# Altium PCB Chargeur.PcbDoc
Units mil, origin at the board's own origin, x right, y up, seen from the top; angles counter-clockwise.
Board outline 2228.79 x 2270.16 mil, 2 copper layers (Top Layer, Bottom Layer); 41 components, 22 nets, 151 pads, 173 vias.
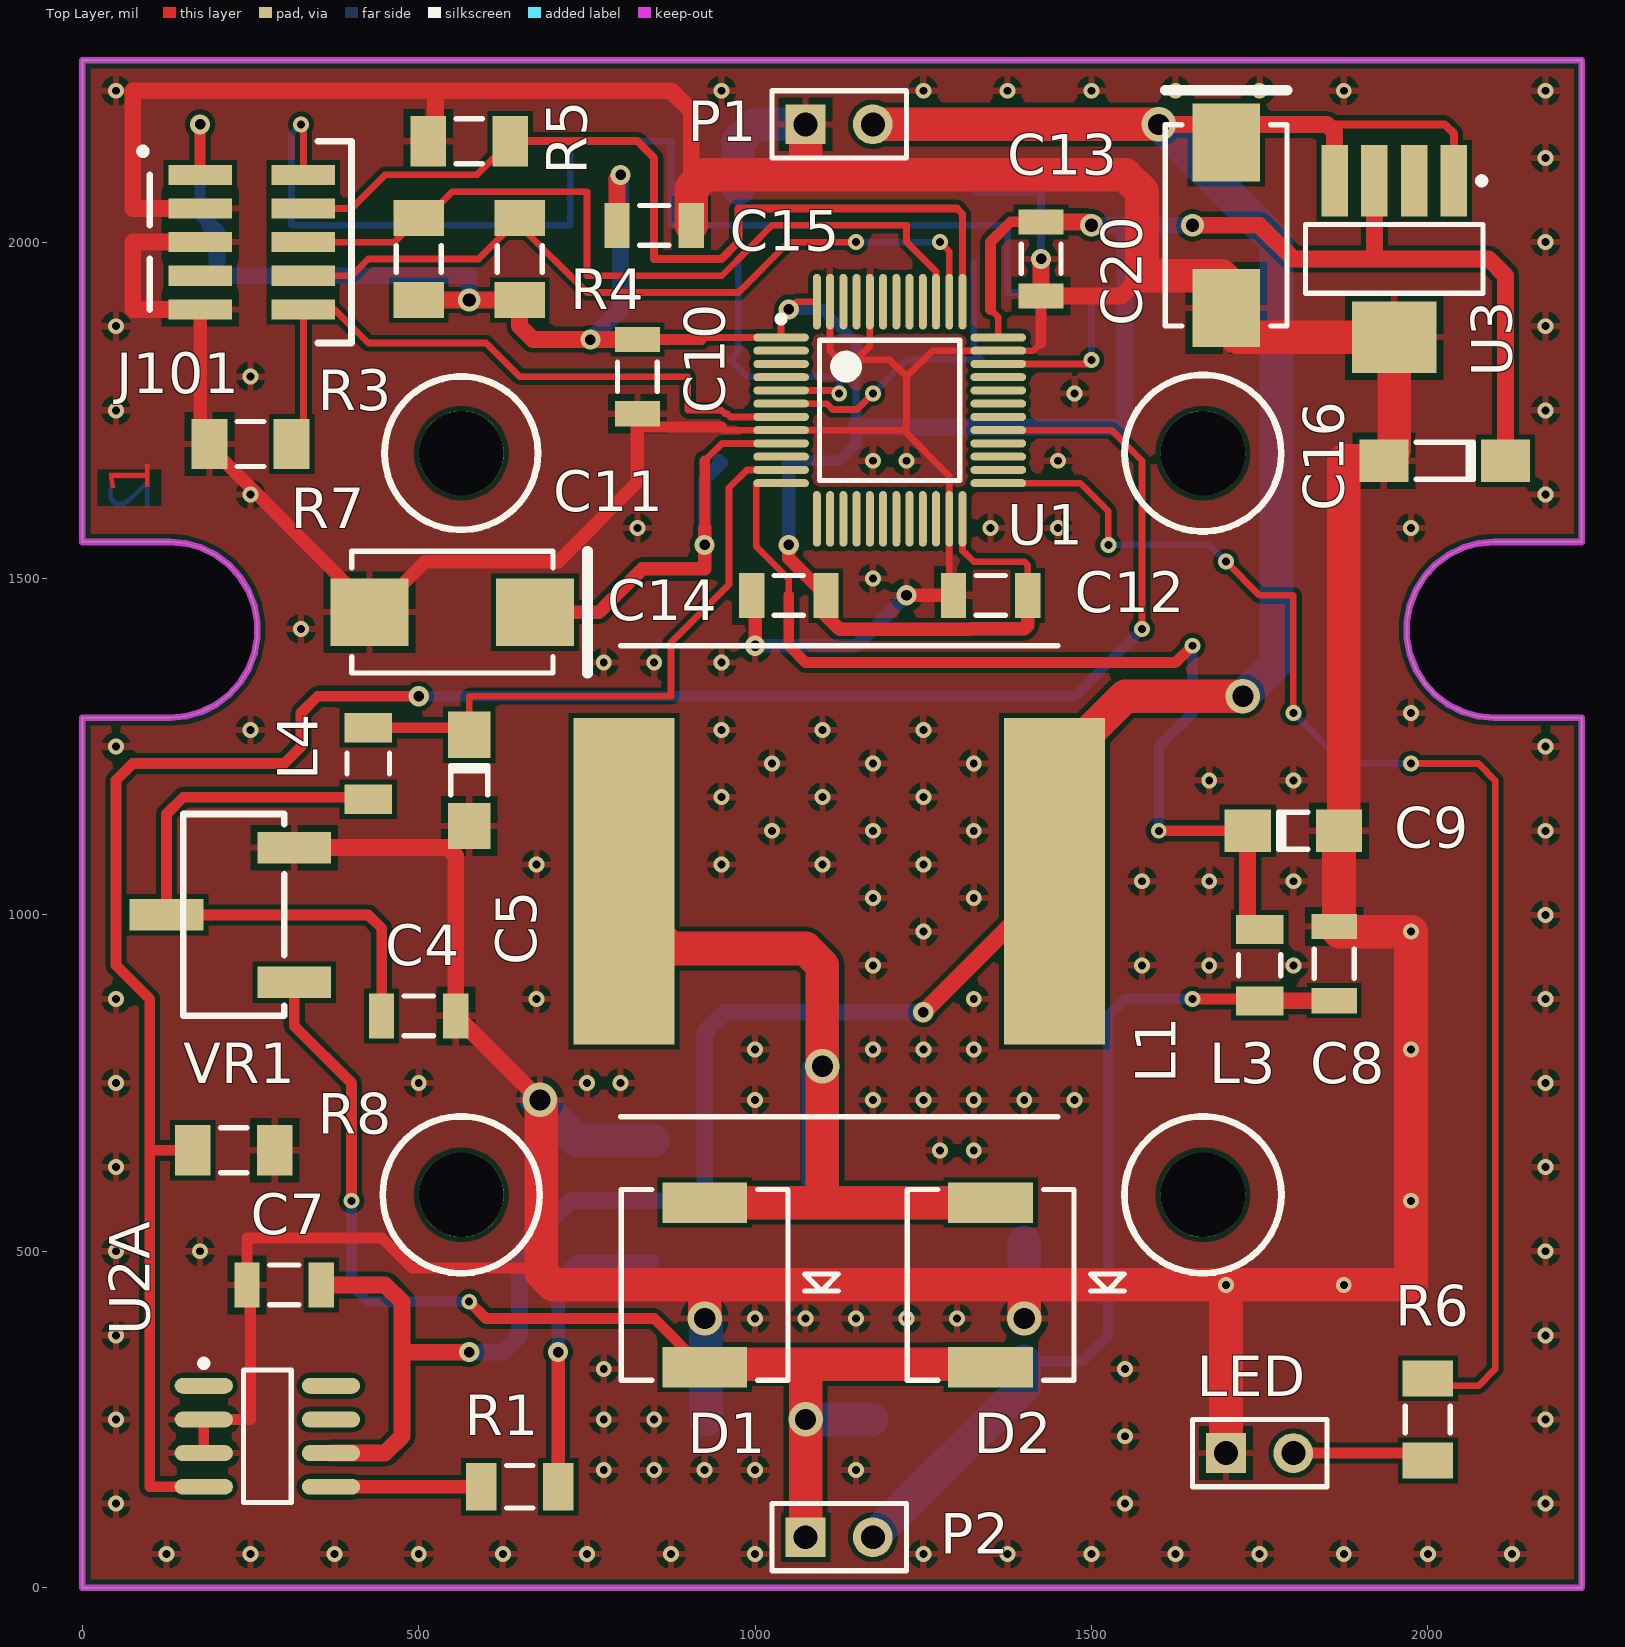
[diagram p0: Top Layer view]
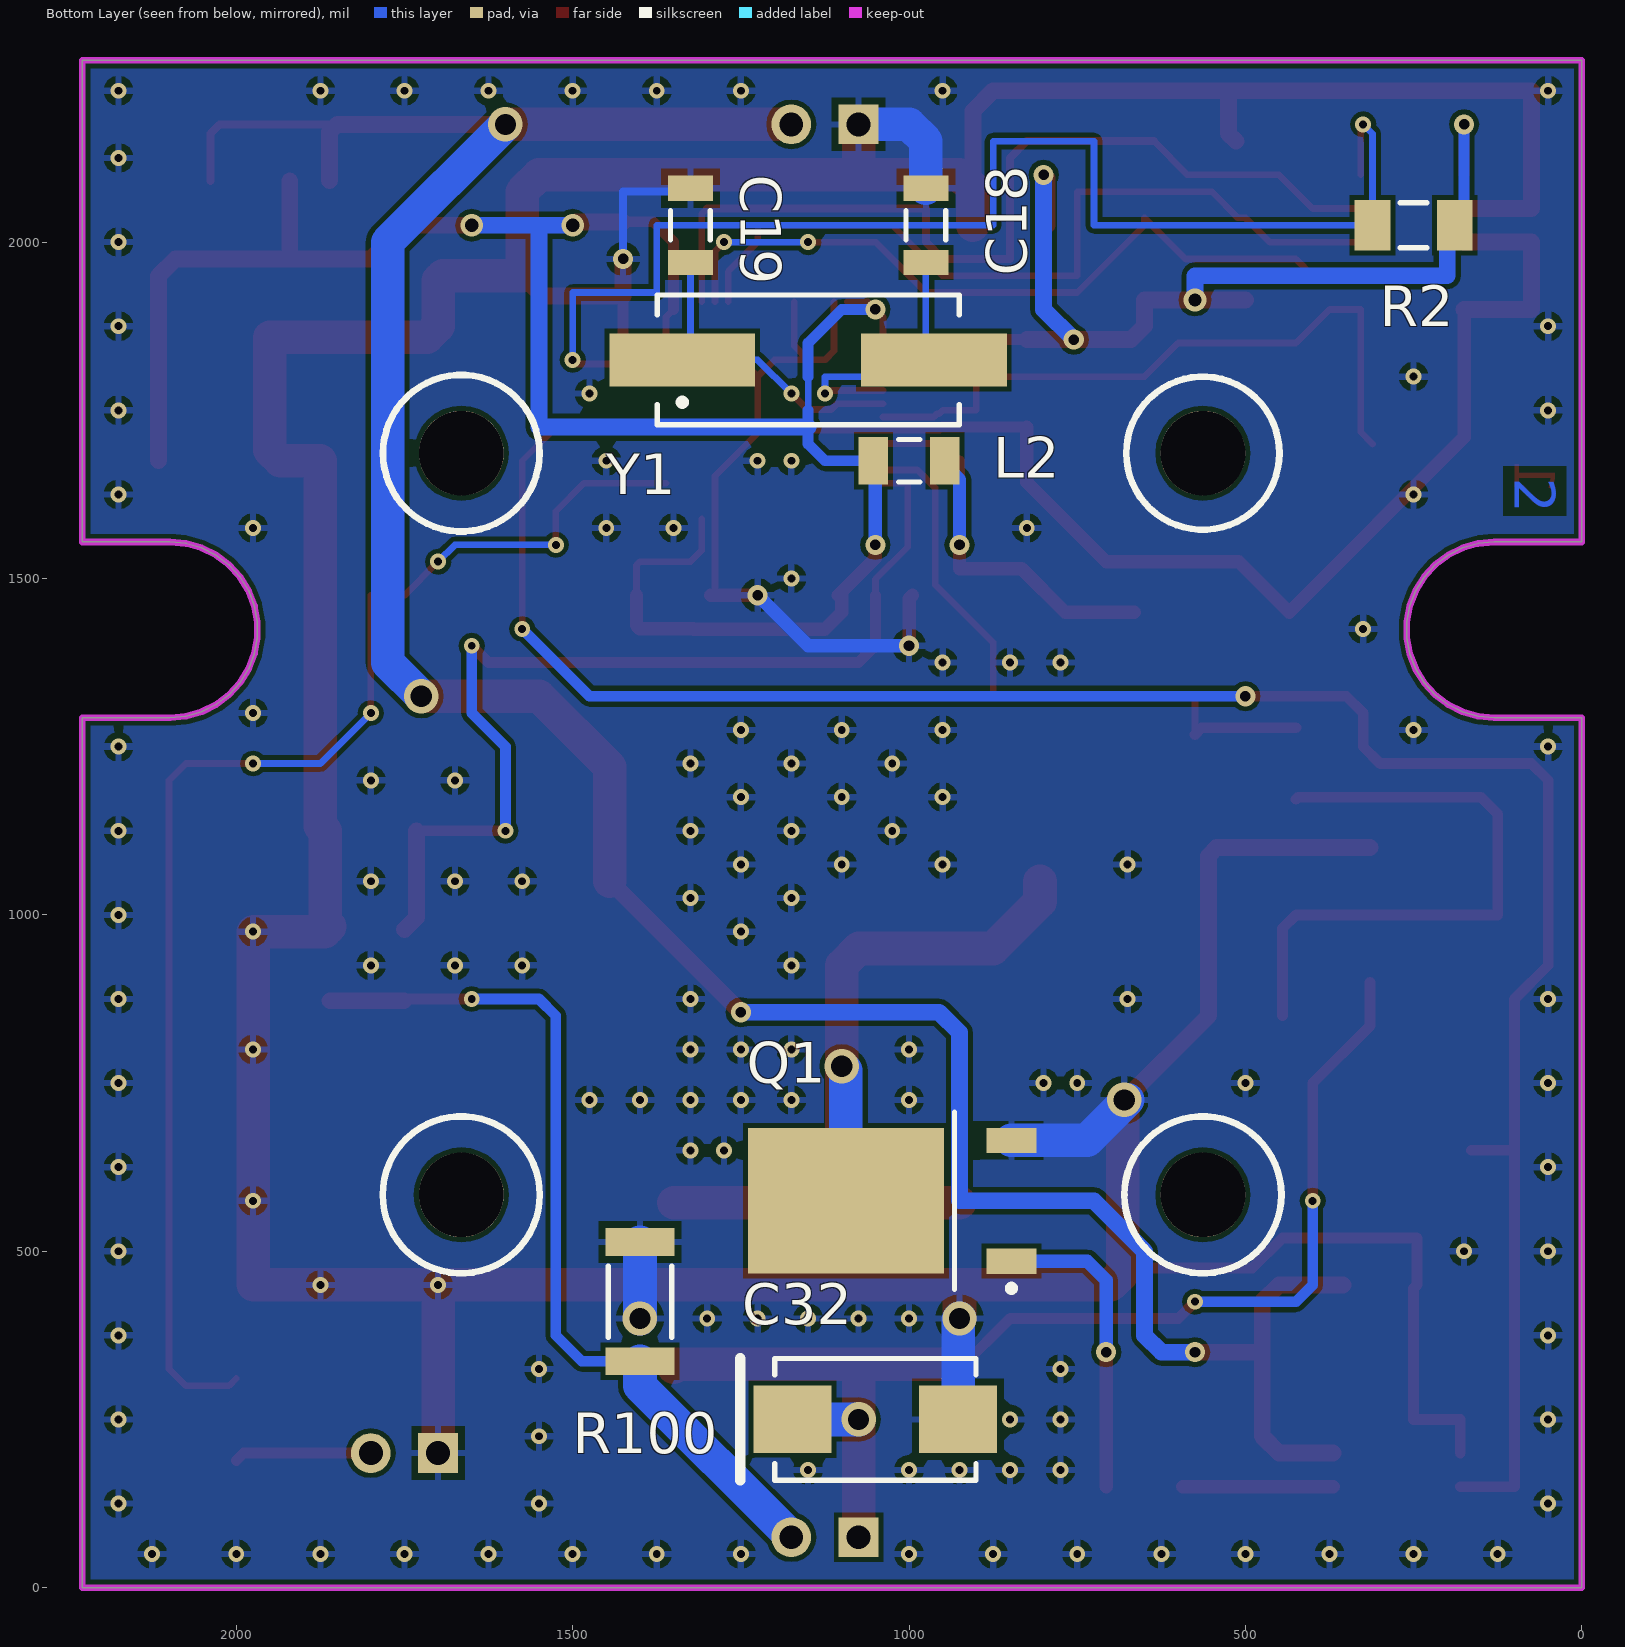
[diagram p1: Bottom Layer view, seen from below]

## Layer stack, top to bottom
Top Solder: solder mask 0.4, Solder Resist, Dk 3.5
Top Layer: signal copper 1.4
Dielectric 1: dielectric 12.6, FR-4, Dk 4.8
Bottom Layer: signal copper 1.4
Bottom Solder: solder mask 0.4, Solder Resist, Dk 3.5

## Board outline
0,2270.16 0,1554.25 130.14,1554.25 154.13,1552.03 177.31,1545.44 198.87,1534.7 218.1,1520.18 234.33,1502.38 247.01,1481.89 255.71,1459.43 260.14,1435.75 260.14,1411.65 255.71,1387.97 247.01,1365.51 234.33,1345.02 218.1,1327.22 198.87,1312.7 177.31,1301.96 154.13,1295.37 130.14,1293.15 0,1293.15 0,0 2228.79,0 2228.79,1293.15 2098.65,1293.15 2074.66,1295.37 2051.49,1301.96 2029.92,1312.7 2010.69,1327.22 1994.46,1345.02 1981.78,1365.51 1973.08,1387.97 1968.65,1411.65 1968.65,1435.75 1973.08,1459.43 1981.78,1481.89 1994.46,1502.38 2010.69,1520.18 2029.92,1534.7 2051.49,1545.44 2074.66,1552.03 2098.65,1554.25 2228.79,1554.25 2228.79,2270.16

## Design rules (kind name [scope] priority, off if disabled: settings)
Clearance [All] p1: gap=7
HoleSize [All] p1: absolutevalues=TRUE maxlimit=137.8 minlimit=0.98 maxpercent=80.000 minpercent=20.000
MinimumSolderMaskSliver [All] p1: minsoldermaskwidth=1
PolygonConnect [All] p1: connectstyle=Relief reliefconductorwidth=10 reliefentries=4 polygonreliefangle="90 Angle" airgapwidth=10
RoutingVias [All] p1: holewidth=15.75 width=30.71 viastyle="Through Hole" minholewidth=11.81 minwidth=23.62 maxholewidth=31.5 maxwidth=51.18
SilkToSolderMaskClearance [IsPad] p1: minsilkscreentomaskgap=5 clearancetoexposedcopper=TRUE
SolderMaskExpansion [All] p1: expansion=4
UnpouredPolygon [All] p1: allowunpoured=FALSE
Width [All] p1: maxlimit=100 minlimit=8 preferedwidth=10
26 further rules are at their usual default settings.

## Components (designator, comment, footprint, x,y, rotation, side; value= is the part's Value field where it differs from the comment)
C4 "CAP 100nF 25V 1206(3216)" CAPC1206(3216)100_L 500,850 r180 top
C5 "CC475B004M" B 575,1200 r270 top
C7 "CAP 100nF 25V 1206(3216)" CAPC1206(3216)100_L 300,450 r0 top
C8 "CAP 100nF 25V 1206(3216)" CAPC1206(3216)100_L 1860.83,927.56 r270 top
C9 "CC475B004M" B 1800,1125 r0 top
C10 "CAP 100nF 25V 1206(3216)" CAPC1206(3216)100_L 825,1800 r90 top
C11 "293D476X9016D2TE3" VISH-7343-31_M 550,1450 r180 top
C12 "CAP 100nF 25V 1206(3216)" CAPC1206(3216)100_L 1350,1475 r0 top
C13 "CAP 100nF 25V 1206(3216)" CAPC1206(3216)100_L 1425,1975 r90 top
C14 "CAP 100nF 25V 1206(3216)" CAPC1206(3216)100_L 1050,1475 r0 top
C15 "CAP 100nF 25V 1206(3216)" CAPC1206(3216)100_L 850,2025 r180 top
C16 "194D335X0015C2" C 2025,1675 r180 top
C18 "CAP 100nF 25V 1206(3216)" CAPC1206(3216)100_L 975,2025 r270 bottom
C19 "CAP 100nF 25V 1206(3216)" CAPC1206(3216)100_L 1325,2025 r270 bottom
C20 "293D476X9016D2TE3" VISH-7343-31_M 1700,2025 r270 top
C32 "293D476X9016D2TE3" VISH-7343-31_M 1050,250 r180 bottom
D1 "MURS340T3G" VISH-DO-214AB-2_V 925,450 r270 top locked
D2 "MURS340T3G" VISH-DO-214AB-2_V 1350,450 r270 top
J101 "Cortex-M Debug 10pins" 2199SB-10G-301523 175,1900 r0 top locked
L1 "IHLP6767GZER101M11" IHLP-6767GZ-11 1125,1050 r180 top locked
L2 "Inductor" INDC3216AL 1000,1675 r180 bottom
L3 "Inductor" INDC3216AL 1750,925 r270 top
L4 "Inductor" INDC3216AL 425,1225 r270 top
LED "Header 2" HDR1X2 1700,200 r0 top
P1 "Header 2" HDR1X2 1075,2175 r0 top
P2 "Header 2" HDR1X2 1075,75 r0 top
Q1 "IRLR8743PBF" TO-252AA_N 1025,575 r0 bottom locked
R1 "470R 5% 1206(3216)" RESC1206(3216)_N 650,150 r180 top
R2 "10K" RESC1206(3216)_M 250,2025 r180 bottom
R3 "10K" RESC1206(3216)_M 500,1975 r270 top
R4 "10K" RESC1206(3216)_M 650,1975 r270 top
R5 "10K" RESC1206(3216)_M 575,2150 r0 top
R6 "10K" RESC1206(3216)_M 2000,250 r90 top
R7 "10K" RESC1206(3216)_M 250,1700 r0 top
R8 "10K" RESC1206(3216)_M 225,650 r180 top
R100 "0.25 Ohm" RESC2010(5025)_L 1400,425 r270 bottom
U1 "STM32F103C6T6A" STM-LQFP48_M 1200,1750 r0 top
U2A "TC4424AVOA713" SOIC-OA8_N 275,225 r0 top locked
U3 "LP38692MPX-5.0" MP05A_M 1950,1975 r270 top locked
VR1 "3269W-1-202K" 3269W 125,1000 r270 top
Y1 "HC49/4H_SMX" HC49/4H_SMX 1150,1825 r180 bottom locked

## Footprints (in the part's own frame and the unit in brackets; to place one, negate y for a bottom-side part, rotate by r counter-clockwise, add the part's x,y. Pads: shape width x height; smd on the part's side, far side on the other; paste and mask are expansions set on the pad)
2199SB-10G-301523 [mm] "Embase male 2x5 contacts, 1.27 mm"
  rect 2.4x0.76 smd: 1(0,5.08) 2(3.9,5.08) 3(0,3.81) 4(3.9,3.81) 5(0,2.54) 6(3.9,2.54) 7(0,1.27) 8(3.9,1.27) 9(0,0) 10(3.9,0)
  silkscreen extent -2.29,-1.27 5.71,6.35, body extent -1.3,-0.48 5.2,5.56, height 4.55
3269W [mm] "Bourns trimpot serie 3269W"
  rect 1.19x2.79 smd: CCW(-2.54,4.826) CW(2.54,4.826) W(0,0)
  silkscreen extent -3.81,0.63 3.81,4.45
B [mm] "Chip Capacitor; Body 3.81 x 1.27 mm (LxW typ)"
  rect 1.75x1.6 smd: 1(-1.725,0) 2(1.725,0)
  silkscreen extent -0.55,-0.7 0.55,0.7
C [mm] "Chip Capacitor; Body 5.08 x 1.27 mm (LxW typ)"
  rect 1.85x1.6 smd: 1(-2.3,0) 2(2.3,0)
  silkscreen extent -1.08,-0.7 1.07,0.7
CAPC1206(3216)100_L [mm] "Chip Capacitor, Body 3.2x1.6mm, Height 1mm, IPC High Density"
  rect 0.95x1.7 smd: 1(-1.4,0) 2(1.4,0)
  silkscreen extent -0.55,-0.75 0.55,0.75, body extent -1.7,-0.9 1.7,0.9, height 1
HC49/4H_SMX [mm] "Surface Mount Quartz Crystal; Body 13.4 (inc. leads) x 4.9 mm (LxW max)"
  rect 5.5x2 smd: 1(-4.75,0) 2(4.75,0)
  silkscreen extent -5.7,-2.45 5.7,2.45
HDR1X2 [mm] "Connector; Header; 2 Position"
  rect 1.5x1.5 hole 0.9: 1(0,0)
  round 1.5 hole 0.9: 2(2.54,0)
  silkscreen extent -1.27,-1.27 3.81,1.27
IHLP-6767GZ-11 [mil] "Vishay IHLP Inductor"
  rect 150x485 smd: 1(-319.75,0) 2(319.75,0)
  silkscreen extent -325,-350 325,350, body extent -338,-338 338,338, height 276
INDC3216AL [mm] "Chip Inductor, Body 3.2x1.6mm, IPC High Density"
  rect 1.1x1.8 smd: 1(-1.35,0) 2(1.35,0)
  silkscreen extent -0.4,-0.8 0.4,0.8, body extent -1.7,-0.9 1.7,0.9, height 0.55
MP05A_M [mm] "SOT223, 5-Leads, Body 6.5x3.5mm, Pitch 1.5mm, Lead Span 7mm, IPC Low Density"
  rect 2.7x1 smd: 1(-2.95,2.25) 2(-2.95,0.75) 3(-2.95,-0.75) 4(-2.95,-2.25)
  rect 2.7x3.2 smd: 5(2.95,0)
  silkscreen extent -3.07,-3.35 1.3,3.43, body extent -1.86,-3.35 1.86,3.35, height 1.8
RESC1206(3216)_M [mm] "Chip Resistor, Body 3.2x1.6mm, IPC Low Density"
  rect 1.35x1.9 smd: 1(-1.55,0) 2(1.55,0)
  silkscreen extent -0.5,-0.85 0.5,0.85, body extent -1.67,-0.87 1.67,0.87, height 0.75
RESC1206(3216)_N [mm] "Chip Resistor, Body 3.2x1.6mm, IPC Medium Density"
  rect 1.15x1.8 smd: 1(-1.45,0) 2(1.45,0)
  silkscreen extent -0.5,-0.8 0.5,0.8, body extent -1.67,-0.87 1.67,0.87, height 0.75
RESC2010(5025)_L [mm] "Chip Resistor, Body 5.0x2.5mm, IPC High Density"
  rect 1.05x2.6 smd: 1(-2.25,0) 2(2.25,0)
  silkscreen extent -1.35,-1.2 1.35,1.2, body extent -2.6,-1.35 2.6,1.35, height 0.71
SOIC-OA8_N [mm] "SOIC, 8-Leads, Body 4.9x3.9mm, Pitch 1.27mm, IPC Medium Density"
  oval 2.2x0.6 smd: 1(-2.4,1.905) 2(-2.4,0.635) 3(-2.4,-0.635) 4(-2.4,-1.905) 5(2.4,-1.905) 6(2.4,-0.635) 7(2.4,0.635) 8(2.4,1.905)
  silkscreen extent -2.52,-2.5 0.9,2.88, body extent -2,-2.5 2,2.5, height 1.75
STM-LQFP48_M [mm] "QFP, 48-Leads, Body 7x7mm, Pitch 0.5mm, IPC Low Density"
  oval 2.1x0.3 smd: 1(-4.1,2.75) 2(-4.1,2.25) 3(-4.1,1.75) 4(-4.1,1.25) 5(-4.1,0.75) 6(-4.1,0.25) 7(-4.1,-0.25) 8(-4.1,-0.75) 9(-4.1,-1.25) 10(-4.1,-1.75) 11(-4.1,-2.25) 12(-4.1,-2.75) 25(4.1,-2.75) 26(4.1,-2.25) 27(4.1,-1.75) 28(4.1,-1.25) 29(4.1,-0.75) 30(4.1,-0.25) 31(4.1,0.25) 32(4.1,0.75) 33(4.1,1.25) 34(4.1,1.75) 35(4.1,2.25) 36(4.1,2.75)
  oval 0.3x2.1 smd: 13(-2.75,-4.1) 14(-2.25,-4.1) 15(-1.75,-4.1) 16(-1.25,-4.1) 17(-0.75,-4.1) 18(-0.25,-4.1) 19(0.25,-4.1) 20(0.75,-4.1) 21(1.25,-4.1) 22(1.75,-4.1) 23(2.25,-4.1) 24(2.75,-4.1) 37(2.75,4.1) 38(2.25,4.1) 39(1.75,4.1) 40(1.25,4.1) 41(0.75,4.1) 42(0.25,4.1) 43(-0.25,4.1) 44(-0.75,4.1) 45(-1.25,4.1) 46(-1.75,4.1) 47(-2.25,4.1) 48(-2.75,4.1)
  silkscreen extent -4.22,-2.65 2.65,3.57, body extent -3.5,-3.5 3.5,3.5, height 1.6
TO-252AA_N [mm] "D-PAK, 4-Leads, Body 6.1x6.5mm, Pitch 2.28mm, Lead Span 9.9mm, IPC Medium Density"
  rect 1.9x0.95 smd: 1(-4.5,2.28) 3(-4.5,-2.28)
  rect 7.4x5.5 smd: 4(1.75,0)
  silkscreen extent -4.62,-3.35 -2.35,3.43, body extent -2.25,-3.37 4.1,3.37, height 2.38
VISH-7343-31_M [mm] "Molded Capacitor, 2-Leads, Body 7.6x4.6mm, IPC Low Density"
  rect 2.95x2.55 smd: 1(-3.125,0) 2(3.125,0)
  silkscreen extent -5.1,-2.3 3.8,2.3, body extent -4.02,-2.3 4.02,2.3, height 3.1
VISH-DO-214AB-2_V [mm] "Molded Diode, 2-Leads, Body 7.11x6.22mm"
  rect 1.52x3.2 smd: 1(-3.105,0) 2(3.105,0)
  silkscreen extent -3.6,-3.15 3.6,5.04, body extent -3.77,-3.11 3.77,3.11, height 2.62

## Part data
C4 C7 C8 C10 C12 C13 C14 C15 C18 C19: library part CMP-1037-04193-1, "CAP 100nF 25V ±10% 1206 (3216 Metric) Thickness 1mm SMD"
C5 C9: "Conformal Coated Solid Tantalum Chip Capacitor: Standard Range, 4.7uF, 20% Tolerance, 4 WVDC @ -55°C to +85°C, Surge = 5V"
C11 C20 C32: library part CMP-1666-00025-1, "Tantalum Capacitor, 47 uF, +/- 10%, 16 V, -55 to 125 degC, 2917 (7343 Metric), RoHS, Tape and Reel"
C16: "Midget Conformal Coated Solid Tantalum Chip Capacitor: 3.3uF, 20% Tolerance, 15 WVDC @ +85°C, Surge = 20V"
D1 D2: library part CMP-1666-00013-4, "High Voltage Surface Mount Schottky Rectifier, 3 A, -65 to 175 degC, 2-Pin SMD, RoHS, Tape and Reel"
L1: library part Inductor, "Inductor"
LED P1 P2: "Header, 2-Pin"
Q1: library part IRFR13N20D, "HEXFET Power MOSFET"
R1: library part CMP-1014-00066-1, "470R 0.25W 5% 1206 (3216 Metric)  SMD"
R2 R3 R4 R5 R6 R7 R8: library part CMP-1014-00098-1, "10K 0.25W 5% 1206 (3216 Metric)  SMD"
R100: library part CMP-1017-00002-1, "1R 0.75W 5% 2010 (5025 Metric)  SMD"
U1: library part CMP-0237-00254-3, "ARM Cortex-M3 32-bit MCU, 32 KB Flash, 10 KB Internal RAM, 37 I/Os, 48-pin LQFP, -40 to 85 degC, Tray"
U2A: "3A Dual High-Speed Power MOSFET Drivers, Non Inverting, Extended Temperature, Tape and Reel"
U3: library part CMP-0062-01830-1, "1A Low Dropout CMOS Linear Regulators, Stable with Ceramic Output Capacitors, 5-pin SOT-223"
VR1: library part "RPot SM", "Square Trimming Potentiometer"
Y1: "Surface Mount Quartz Crystal"

## Free pads (board coordinates)
  round 125.98 hole 125.98 unplated: 1(563.21,583.9) 1(563.21,1686.26) 1(1665.58,583.9) 1(1665.58,1686.26)

## Via types
v1: diameter 23.62, hole 11.81, Top Layer to Bottom Layer, tented both sides, 150 vias
v2: diameter 29.92, hole 15.75, Top Layer to Bottom Layer, tented both sides, 13 vias
v3: diameter 51.18, hole 31.5, Top Layer to Bottom Layer, tented both sides, 7 vias
v4: diameter 33.86, hole 19.68, Top Layer to Bottom Layer, tented both sides, 3 vias

## Nets (pads, with @x,y where several pads share a name; then routed paths per layer and width w, separated by ;. In a path a pad name is that pad's centre, name@x,y a point inside that pad or via, vN(x,y) a via of type N, cw(c..) or ccw(c..) an arc to the next point about the centre after c; other vN are vias at no path point)
3V3: C10.2 C12.2 C13.2 C14.2 C15.2 C16.1 J101.1 L2.1 R2.2 R3.2 R4.2 U1.1 U1.24 U1.36 U1.48 U3.3 | length 4978.9
  Top Layer w10: 919.88,1855.12 923.03,1858.27 U1.1 1038.58,1888.58 v2(1050,1900) 1061.42,1911.42 U1.48 ; U1.24 1308.27,1541.73 1325,1525 1400,1525 1405.12,1519.88 C12.2 ; 1350,1900 1361.42,1888.58 U1.36
  Top Layer w16: J101.1 v2(175,2175) ; C10.2 919.88,1855.12 ; 1350,1900 1350,2000 1380.12,2030.12 C13.2
  Top Layer w20: v2(1050,1550) 1050,1530.12 C14.2 1100,1475 1100,1450 1125.46,1424.54 1320.62,1424.54 1321.09,1425 1400,1425 1405.12,1430.12 C12.2
  Top Layer w25: R3.2 v4(575,1913.98) R4.2 650,1875 669.88,1855.12 v2(755.12,1855.12) C10.2 ; C15.2 794.88,2094.88 v2(800,2100) ; C13.2 1494.88,2030.12 v4(1500,2025) ; v4(1650,2025) 1750,2025 1800,1975 2090.55,1975 2115.55,1950 C16.1 ; 1920.47,1979.53 U3.3
  Bottom Layer w10: 1150,1750 1150,1800
  Bottom Layer w16: v2(175,2175) 175,2038.98 R2.2 ; v2(1050,1900) 1100,1900 1150,1850 1150,1800 ; L2.1 1125,1675 1150,1700 1150,1725 1150,1750
  Bottom Layer w20: v2(1050,1550) 1050,1671.85 L2.1
  Bottom Layer w25: R2.2 200,2013.98 200,1950 575,1950 v4(575,1913.98) ; v2(755.12,1855.12) 800,1900 v2(800,2100) ; 1150,1725 1550,1725 1550,2025 ; v4(1500,2025) 1550,2025 ; v4(1650,2025) 1550,2025
5V: C7.2 C20.1 L1.1 P1.2 U2A.6 U3.1 U3.4 | length 4390.3
  Top Layer w12: 1850,2175 2025,2175 2038.58,2161.42 U3.1
  Top Layer w25: C7.2 450,450 475,425 475,350 ; U2A.6 450,200 475,225 475,350 ; v2(575,350) 475,350 ; v2(1250,855.25) L1.1 ; v3(1600,2175) 1850,2175 1861.42,2163.58 U3.4
  Top Layer w50: P1.2 v3(1600,2175) ; L1.1 1444.75,1219.75 1550,1325 v3(1725,1325)
  Bottom Layer w25: v2(575,350) 625,350 650,375 650,500 725,575 925,575 925,825 955.25,855.25 v2(1250,855.25)
  Bottom Layer w50: v3(1600,2175) 1775,2000 1775,1375 v3(1725,1325)
CMD_MOS: R8.2 U1.29 U2A.4 | length 3345.1
  Top Layer w10: U1.29 1529.53,1720.47 1575,1675 v1(1575,1425)
  Top Layer w16: R8.2 100,650 ; U2A.4 100,150 100,650 ; v2(500,1325) 350,1325 325,1300 325,1250 300,1225 75,1225 50,1200 50,925 100,875 100,650
  Bottom Layer w16: v2(500,1325) 1475,1325 v1(1575,1425)
GND: C4.1 C5.2 C7.1 C8.1 C9.2 C10.1 C11.2 C12.1 C13.1 C14.1 C15.1 C16.2 C18.1 C19.1 C20.2 C32.2 J101.3 J101.5 J101.9 LED.1 P1.1 Q1.3 R5.1 R7.1 R8.1 R100.1 U1.8 U1.23 U1.35 U1.44 U1.47 U2A.2 U2A.3 U3.5 VR1.CCW | length 11939.6
  Top Layer w10: 950,1725 954.53,1720.47 U1.8 1220.47,1720.47 ; U1.47 1111.42,1838.58 1125,1825 1150,1825 ; U1.44 1170.47,1845.47 1150,1825 ; C12.1 1288.58,1481.3 U1.23 1288.58,1652.36 1220.47,1720.47 ; 1425,1850 1413.58,1838.58 U1.35 1263.58,1838.58 1225,1800 ; 1150,1825 1200,1825 1225,1800 ; 1220.47,1720.47 1225,1725 1225,1800
  Top Layer w16: U2A.3 U2A.2 250,250 250,444.88 C7.1 244.88,519.88 444.88,519.88 489.76,475 675,475 682.09,467.91 ; 825,1725 950,1725 ; 1425,1850 C13.1
  Top Layer w20: J101.9 175,1709.84 434.84,1450 509.84,1525 707.09,1525 825,1642.91 825,1725 ; C14.1 1000,1469.88 v2(1000,1400) ; v2(1225,1475) C12.1
  Top Layer w25: J101.9 75,1900 75,2000 J101.5 ; J101.3 75,2050 75,2225 525,2225 ; VR1.CCW 542.91,1100 555.12,1087.8 C4.1 v3(680.12,725) ; R5.1 525,2161.02 525,2225 ; 905.12,2080.12 905.12,2194.88 875,2225 525,2225 ; v2(1425,1975) C13.1 1544.88,1919.88 1575,1950
  Top Layer w50: v3(680.12,725) 682.09,723.03 682.09,467.91 700,450 925,450 ; C15.1 905.12,2080.12 925,2100 1075,2100 ; v3(925,400) 925,450 ; P1.1 1075,2100 ; v3(1400,400) 1400,450 ; LED.1 v1(1700,450) ; 925,450 1400,450 ; 1075,2100 1550,2100 1575,2075 1575,1950 1692.91,1950 1700,1942.91 1700,1875 1716.14,1858.86 U3.5 1950,1690.55 C16.2 1875,1675 1875,1132.09 C9.2 1867.91,989.76 C8.1 1868.5,975 v1(1975,975) 1975,450 v1(1700,450) ; 1400,450 v1(1700,450)
  Bottom Layer w12: C19.1 1330.12,2075 1425,2075 v2(1425,1975)
  Bottom Layer w20: v2(1000,1400) 1150,1400 v2(1225,1475)
  Bottom Layer w50: v3(680.12,725) 675,725 735.24,664.76 Q1.3 ; v3(925,400) 926.97,398.03 C32.2 ; C18.1 975,2150 1000,2175 P1.1 ; v3(1400,400) R100.1
  other v1: 125,50 250,50 375,50 500,50 625,50 750,50 875,50 1000,50 1250,50 1375,50 1500,50 1625,50 1750,50 1875,50 2000,50 2125,50 50,125 1550,125 2175,125 775,175 850,175 925,175 1000,175 1150,175 1550,225 50,250 775,250 850,250 2175,250 775,325 1550,325 50,375 2175,375 1000,400 1075,400 1150,400 1225,400 1300,400 1875,450 50,500 175,500 2175,500 1975,575 50,625 2175,625 1275,650 1325,650 1000,725 1175,725 1250,725 1325,725 1400,725 1475,725 50,750 500,750 750,750 800,750 2175,750 1000,800 1175,800 1250,800 1325,800 1975,800 50,875 675,875 1325,875 2175,875 1175,925 1575,925 1675,925 1800,925 1250,975 2175,1000 1175,1025 1325,1025 1575,1050 1675,1050 1800,1050 675,1075 950,1075 1100,1075 1250,1075 1025,1125 1175,1125 1325,1125 2175,1125 950,1175 1100,1175 1250,1175 1675,1200 1800,1200 1025,1225 1175,1225 1325,1225 50,1250 2175,1250 250,1275 950,1275 1100,1275 1250,1275 1975,1300 775,1375 850,1375 950,1375 325,1425 1175,1500 825,1575 1350,1575 1450,1575 1975,1575 250,1625 2175,1625 1175,1675 1225,1675 1450,1675 50,1750 2175,1750 1475,1775 250,1800 50,1875 2175,1875 2175,2000 2175,2125 50,2225 950,2225 1250,2225 1375,2225 1500,2225 1625,2225 1750,2225 1875,2225 2175,2225
LEDACT: R6.2 U1.25 | length 2043.3
  Top Layer w10: U1.25 1483.27,1641.73 1525,1600 v1(1525,1550) ; v1(1700,1525) 1750,1475 1800,1475 v1(1800,1300) ; v1(1975,1225) 2075,1225 2100,1200 2100,325 2075,300 2011.02,300 R6.2
  Bottom Layer w10: v1(1525,1550) 1675,1550 v1(1700,1525) ; v1(1800,1300) 1875,1225 v1(1975,1225)
MES_COURANT: C9.1 L3.1 U1.12 | length 1501.3
  Top Layer w10: U1.12 1001.78,1641.73 1001.78,1547.23 1050,1499.01 1050,1475
  Top Layer w16: 1050,1475 1050,1400 1075,1375 1625,1375 v1(1650,1400) ; v1(1600,1125) C9.1
  Top Layer w25: C9.1 1732.09,996.06 L3.1
  Bottom Layer w16: v1(1600,1125) 1600,1250 1650,1300 v1(1650,1400)
MES_TENSION: C5.1 L4.1 U1.11 | length 945.3
  Top Layer w10: C5.1 575,1325 875,1325 875,1404.71 961.17,1490.89 961.17,1634.86 987.73,1661.42 U1.11
  Top Layer w16: L4.1 564.76,1278.15 C5.1
NetC4_2: C4.2 L4.2 VR1.W | length 919.9
  Top Layer w16: L4.2 421.85,1175 150,1175 125,1150 VR1.W 425,1000 444.88,980.12 C4.2
NetC8_2: C8.2 L3.2 P2.2 R100.2 | length 1317.8
  Top Layer w16: v1(1650,875) 1748.03,875 L3.2@1750.59,872.44
  Top Layer w25: L3.2@1750.59,872.44 C8.2
  Bottom Layer w16: R100.2 1486.42,336.42 1525,375 1525,850 1550,875 v1(1650,875)
  Bottom Layer w50: P2.2 1400,300 R100.2
NetC11_1: C11.1 L2.2 U1.9 | length 708.2
  Top Layer w10: 925,1675 950.79,1700.79 U1.9
  Top Layer w16: 925,1575 925,1675
  Top Layer w20: C11.1@665.16,1450 767.91,1450 832.09,1514.17 925,1514.17 v2(925,1550) 925,1575
  Bottom Layer w20: v2(925,1550) 925,1646.85 950,1671.85 L2.2
NetC18_2: C18.2 U1.5 Y1.2 | length 435.5
  Top Layer w10: U1.5 1120.47,1779.53 v1(1125,1775)
  Bottom Layer w10: C18.2 975,1837.01 Y1.2 987.99,1800 1125,1800 v1(1125,1775)
NetC19_2: C19.2 U1.6 Y1.1 | length 482.4
  Top Layer w10: U1.6 1106.48,1759.84 1115.14,1751.19 1151.19,1751.19 v1(1175,1775)
  Bottom Layer w10: v1(1175,1775) 1225,1825 Y1.1 1325,1837.01 C19.2
NetC32_1: C32.1 D1.2 D2.2 P2.1 VR1.CW | length 1848.8
  Top Layer w16: VR1.CW 315,835 400,750 v1(400,575) ; v1(575,425) 600,400 850,400 922.24,327.76 D1.2
  Top Layer w50: D1.2 929.33,332.09 1064.67,332.09 ; P2.1 v3(1075,250) 1075,321.75 1064.67,332.09 ; D2.2 1345.67,332.09 1064.67,332.09
  Bottom Layer w16: v1(400,575) 400,450 425,425 v1(575,425)
  Bottom Layer w50: v3(1075,250) C32.1
NetD1_1: D1.1 D2.1 L1.2 Q1.4 | length 1344.5
  Top Layer w50: L1.2 805.25,1019.75 875,950 1075,950 1100,925 v3(1100,775) 1100,572.24 ; D1.1 1100,572.24 ; D2.1 1100,572.24
  Bottom Layer w50: Q1.4 1093.9,768.9 v3(1100,775)
NetLED_2: LED.2 R6.1 | length 204.6
  Top Layer w16: LED.2 1988.98,200 R6.1
NetQ1_1: Q1.1 R1.1 | length 459.5
  Top Layer w20: R1.1 v2(707.09,350)
  Bottom Layer w20: v2(707.09,350) 707.09,457.09 735.24,485.24 Q1.1
NetR1_2: R1.2 U2A.5 | length 223.4
  Top Layer w20: U2A.5 R1.2
NRST: J101.10 R7.2 U1.7 | length 1012.8
  Top Layer w10: R7.2 328.54,1717.52 J101.10 375,1900 425,1850 600,1850 650,1800 900,1800 900,1750 950,1750 955,1745 958.28,1745 963.13,1740.16 U1.7
TCK: J101.4 R5.2 U1.37 | length 1375.6
  Top Layer w10: J101.4 400,2050 450,2100 586.02,2100 R5.2 ; 1300,2050 1308.27,2041.73 U1.37
  Top Layer w12: R5.2 825,2150 850,2125 850,1975 950,1975 975,2000 975,2050 1300,2050
TDI: J101.8 R4.1 U1.38 | length 1159.8
  Top Layer w10: J101.8 400,1950 425,1975 588.98,1975 R4.1 650,2025 750,1925 975,1925 1050,2000 v1(1150,2000) ; v1(1275,2000) 1288.58,1986.42 U1.38
  Bottom Layer w10: v1(1150,2000) v1(1275,2000)
TDO: J101.6 R3.1 U1.39 | length 1215.6
  Top Layer w10: J101.6 463.98,2000 R3.1 511.02,2036.02 550,2075 750,2075 750,1950 950.46,1950 993,1992.54 993,1993 1025,2025 1225,2025 1225,2000 1268.9,1956.1 U1.39
TMS: J101.2 R2.1 U1.34 | length 2012.3
  Top Layer w10: v1(325,2175) 328.54,2171.46 J101.2 ; U1.34 1493.9,1818.9 v1(1500,1825)
  Bottom Layer w10: v1(325,2175) 311.02,2161.02 R2.1 725,2025 725,2150 875,2150 875,2025 1375,2025 1375,1925 1500,1925 v1(1500,1825)
pads on no net: J101.7 U1.2 U1.3 U1.4 U1.10 U1.13 U1.14 U1.15 U1.16 U1.17 U1.18 U1.19 U1.20 U1.21 U1.22 U1.26 U1.27 U1.28 U1.30 U1.31 U1.32 U1.33 U1.40 U1.41 U1.42 U1.43 U1.45 U1.46 U2A.1 U2A.7 U2A.8 U3.2

## Polygon pours and split planes (outlines as drawn)
GND on Bottom Layer "Bot Overlay-GND" (solid, remove dead copper, pour order 2): -25,2300 2250,2300 2250,-25 -25,-25
GND on Top Layer "Top Overlay-GND" (solid, remove dead copper, pour order 4): -25,2300 2250,2300 2250,-25 -25,-25

## Keep-outs
Keep-Out Layer:
  the board outline again, w10

## Other copper
Top Layer:
  text "1" at 100,1625 h60 r90
Bottom Layer:
  text "2" at 100,1650 h60 r90

## Silkscreen, mask and mechanical layers (free items; w line width, h text height)
Top Overlay:
  circle w10: c563.21,1686.26 r114.05
  circle w10: c1665.58,1686.26 r116.39
  circle w10: c1665.58,583.9 r116.69
  circle w10: c563.21,583.9 r116.7
Bottom Overlay:
  circle w10: c563.21,583.9 r116.7
  circle w10: c1665.58,583.9 r116.69
  circle w10: c1665.58,1686.26 r116.39
  circle w10: c563.21,1686.26 r113.77
Bottom Solder:
  drawing of 13 lines, arcs and shapes, not listed
  text "Chargeur Dumber" at 1925,1150 h60 r90
  text "Departement GEI" at 1025,975 h60
  text "Ver 1.0" at 2075,925 h60 r90
  text "2016" at 400,850 h60
Mechanical 15:
  lines w10: 0,-60 0,-40 ; 60,-70 0,-50 ; 60,-30 0,-50 ; 831.59,-50 0,-50 ; 1393.41,-50 2225,-50 ; 2165,-70 2225,-50 ; 2165,-30 2225,-50 ; 2225,-60 2225,-40 ; 2255,60 2275,0 ; 2255,2215 2275,2275 ; 2265,0 2285,0 ; 2265,2275 2285,2275 ; 2275,856.59 2275,0 ; 2275,1418.41 2275,2275 ; 2295,60 2275,0 ; 2295,2215 2275,2275
  text "2275 (mil)" at 2310.99,866.59 h60 r90
  text "2225 (mil)" at 841.59,-85.99 h60